# Altium PCB Inverter_Control.PcbDoc (part 2 of 2)
Units mm, origin at the board's own origin, x right, y up, seen from the top; angles counter-clockwise.
Board outline 150 x 40 mm, 4 copper layers (TOP, GND, PWR, BOT), stack 1.44 mm thick; 99 components, 92 nets, 378 pads, 6 vias.
Unrouted connection lines stored in the file: 133.
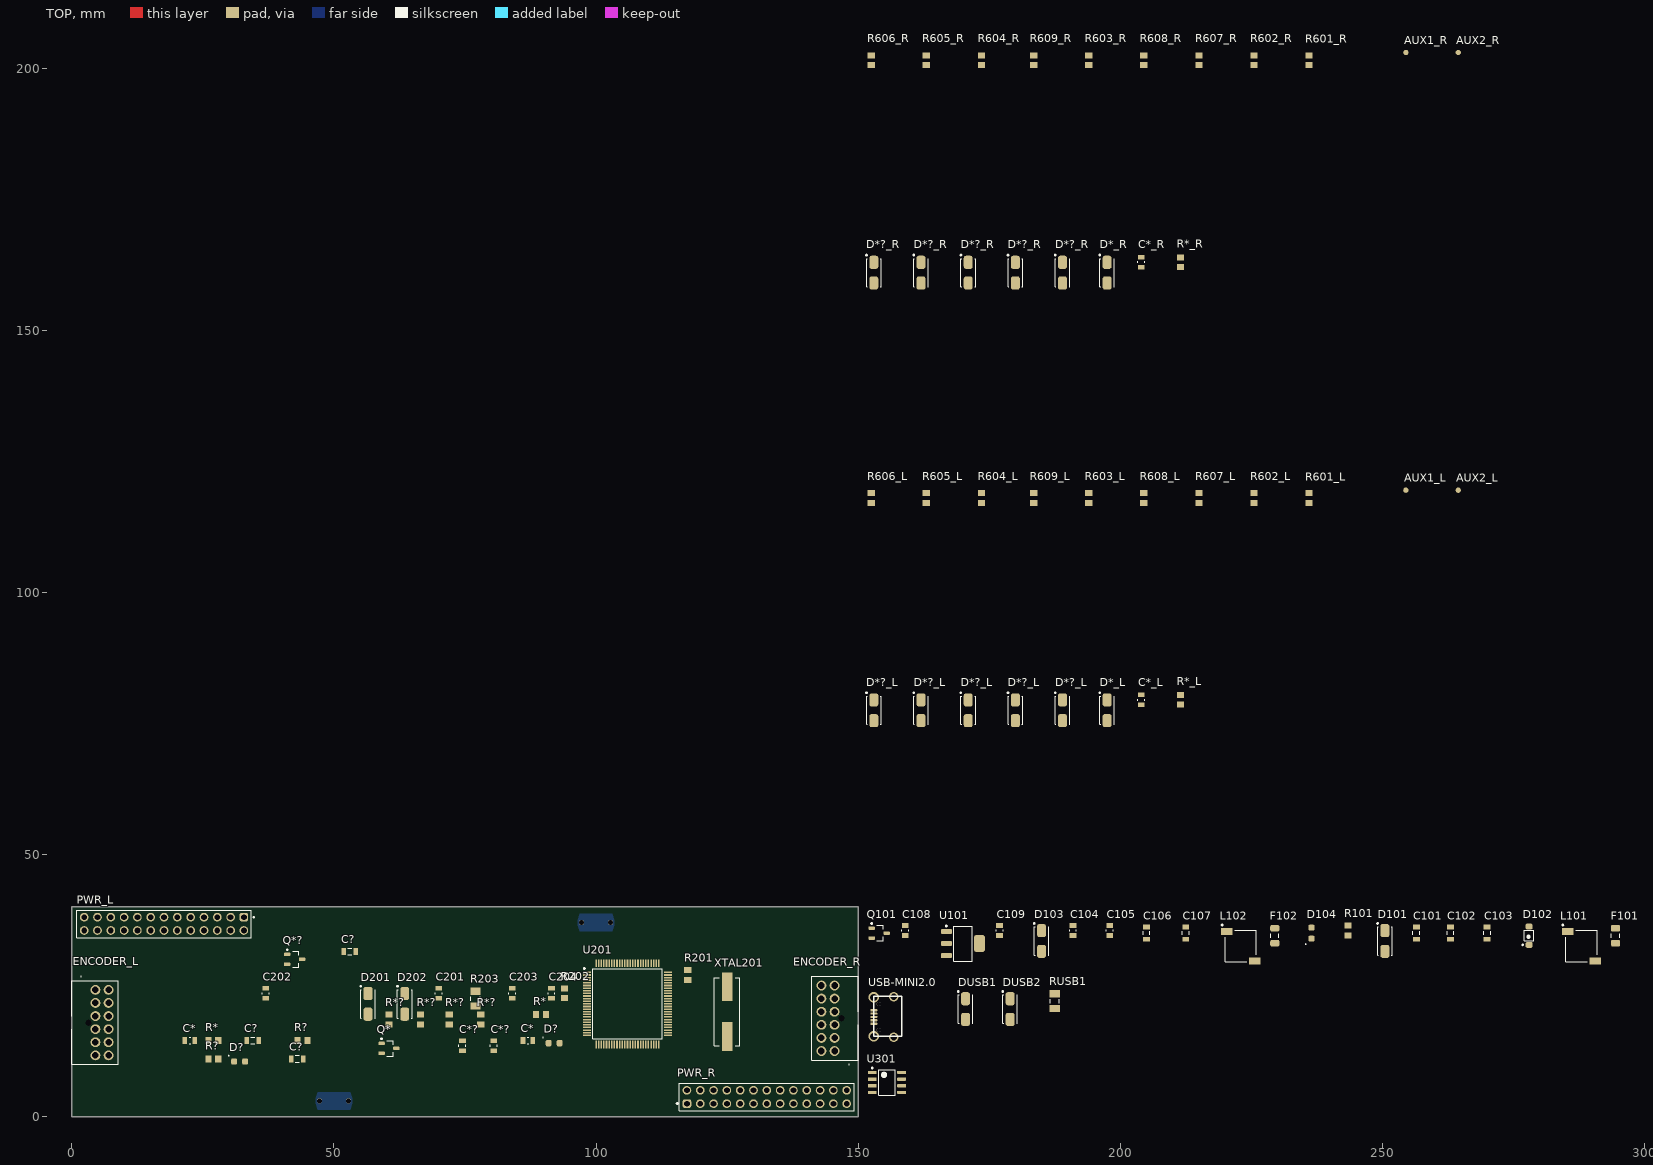
[diagram p0: TOP view]

## Part data (continued)
R601_L R601_R R602_L R602_R R603_L R603_R R604_L R604_R R605_L R605_R R606_L R606_R R* R*? R*? R*?: library part R10k-0805FTK, "BOURNS         CR0805-JW-103ELF            Surface Mount Chip Resistor, Thick Film, CR Series, 10 kohm, 125 mW,  5%, 150 V", Case Code (Imperial)=0805, Case Code (Metric)=2012, Manufacturer 1=Bourns, Max Operating Temperature=155°C, Max Power Dissipation=125mW, Min Operating Temperature=-55°C, Package Quantity=1, Resistance=10kR, Resistance Tolerance=5%, Resistor Type="Thick Film", Temperature Coefficient=200ppm/°C, Voltage Rating=150V, Voltage Rating (DC)=100V, .Creator=DR, Case/Package=0805, Category="Chip SMD Resistors", ComponentLink1Description=https://datasheet.ciiva.com/11821/0900766b80fcdb72-11821135.pdf?src-supplier=RSComponents, ComponentLink1URL=https://datasheet.ciiva.com/11821/0900766b80fcdb72-11821135.pdf?src-supplier=RSComponents, ComponentLink2Description=https://datasheet.ciiva.com/9122/chpreztr-9122374.pdf?src-supplier=Avnet, ComponentLink2URL=https://datasheet.ciiva.com/9122/chpreztr-9122374.pdf?src-supplier=Avnet, ComponentLink3Description=https://datasheet.ciiva.com/22693/1902866-22693254.pdf?src-supplier=Element14, ComponentLink3URL=https://datasheet.ciiva.com/22693/1902866-22693254.pdf?src-supplier=Element14, ComponentLink4Description=https://datasheet.ciiva.com/7986/691949-7986187.pdf?src-supplier=Element14, ComponentLink4URL=https://datasheet.ciiva.com/7986/691949-7986187.pdf?src-supplier=Element14, ComponentLink5Description=https://datasheet.ciiva.com/30065/159chpreztr-30065976.pdf?src-supplier=Onlinecomponents.com, ComponentLink5URL=https://datasheet.ciiva.com/30065/159chpreztr-30065976.pdf?src-supplier=Onlinecomponents.com, ComponentLink6Description=https://datasheet.ciiva.com/16783/70154685-16783482.pdf?src-supplier=Allied+Electronics, ComponentLink6URL=https://datasheet.ciiva.com/16783/70154685-16783482.pdf?src-supplier=Allied+Electronics, ComponentLink7Description=https://datasheet.ciiva.com/5548/chpreztr-5548491.pdf?src-supplier=Mouser, ComponentLink7URL=https://datasheet.ciiva.com/5548/chpreztr-5548491.pdf?src-supplier=Mouser, ComponentLink8Description=https://datasheet.ciiva.com/6559/chpreztr-6559900.pdf?src-supplier=Digi-Key, ComponentLink8URL=https://datasheet.ciiva.com/6559/chpreztr-6559900.pdf?src-supplier=Digi-Key, ComponentLink9Description=https://datasheet.ciiva.com/6559/chpreztr-6559901.pdf?src-supplier=Digi-Key, ComponentLink9URL=https://datasheet.ciiva.com/6559/chpreztr-6559901.pdf?src-supplier=Digi-Key, ComponentLink10Description=https://datasheet.ciiva.com/7985/1856384-7985869.pdf?src-supplier=Element14, ComponentLink10URL=https://datasheet.ciiva.com/7985/1856384-7985869.pdf?src-supplier=Element14, ComponentLink11Description=https://datasheet.ciiva.com/48692/001055517-da-01-en-smd-wid-cr0805-jw-103elf-10k-ohm-1-8w-48692118.pdf?src-supplier=Conrad, ComponentLink11URL=https://datasheet.ciiva.com/48692/001055517-da-01-en-smd-wid-cr0805-jw-103elf-10k-ohm-1-8w-48692118.pdf?src-supplier=Conrad, Construction=Rectangular, Contact Plating=Tin, Depth=1.25mm, Features="Moisture Resistant", Height=0.5mm, Length=2mm, Manufacturer Part Number 1=CR0805-JW-103ELF, Military Standard=Not, Mount="Surface Mount", Number of Pins=2, Number of Terminations=2, Packaging="Tape and Reel", Power Rating=125mW, Pricing 1="1=0,05790, 10=0,01540, 25=0,01340, 100=0,00340 (USD)", Radiation Hardening=No, REACH SVHC="No SVHC", RoHS=Yes, RoHS Compliant=Yes, Series=CR0805, Stock 1=57566, Supplier 1="Arrow Electronics", Supplier Part Number 1=CR0805-JW-103ELF, Technology="THICK FILM", Termination=SMD/SMT, Thickness=508um, TOLERANCE=5%, Width=1.25mm
R607_L R607_R R608_L R608_R R609_L R609_R: library part R15-0805FTN, "TE Connectivity CPF Series Precision Thin Film Surface Mount Resistor 0805 Case 15 0.1% 0.1W 25ppm/C", Case/Package=0805, Manufacturer="TE Connectivity", Max Operating Temperature=125°C, Min Operating Temperature=-55°C, Power Rating=100mW, Resistance=15R, Supplier Part Number 1=6662373, Temperature Coefficient=25ppm/°C, TOLERANCE=0.1%, .Creator=DR, Category=Resistor, ComponentLink1Description=Datasheet, ComponentLink2Description="Where buy it", ComponentLink3Description=https://datasheet.ciiva.com/11812/0900766b80cecff9-11812882.pdf?src-supplier=RSComponents, ComponentLink3URL=https://datasheet.ciiva.com/11812/0900766b80cecff9-11812882.pdf?src-supplier=RSComponents, Depth=1.25mm, Height=0.5mm, Length=2mm, Manufacturer Part Number=CPF0805B15RE, Mount="Surface Mount", Pricing 1="5=0,35100, 50=0,32700, 100=0,30500, 250=0,28400, 500=0,25900 (USD)", RoHS=Yes, Stock 1=1, Supplier 1=RSComponents, Termination=SMD/SMT
R* R*?: library part R1k-0805FTK, "Res Thick Film 0805 1K Ohm 5% 1/8W ±200ppm/°C Molded SMD SMD Paper Tape on Plastic Reel", Case Code (Imperial)=0805, Case Code (Metric)=2012, Manufacturer 1=Bourns, Max Operating Temperature=155°C, Max Power Dissipation=125mW, Min Operating Temperature=-55°C, Package Quantity=1, Resistance=1kR, Resistor Type="Thick Film", Temperature Coefficient=200ppm/°C, TOLERANCE=5%, Voltage Rating=150V, .Creator=GP, Case/Package=0805, Category="Chip SMD Resistors", ComponentLink1Description=https://datasheet.ciiva.com/11821/0900766b80fcdb72-11821134.pdf?src-supplier=RSComponents, ComponentLink1URL=https://datasheet.ciiva.com/11821/0900766b80fcdb72-11821134.pdf?src-supplier=RSComponents, ComponentLink2Description=https://datasheet.ciiva.com/15225/getdatasheetpartid-78155-15225381.pdf?src-supplier=Verical, ComponentLink2URL=https://datasheet.ciiva.com/15225/getdatasheetpartid-78155-15225381.pdf?src-supplier=Verical, ComponentLink3Description=https://datasheet.ciiva.com/22693/1902866-22693253.pdf?src-supplier=Element14, ComponentLink3URL=https://datasheet.ciiva.com/22693/1902866-22693253.pdf?src-supplier=Element14, ComponentLink4Description=https://datasheet.ciiva.com/7986/1856384-7986184.pdf?src-supplier=Element14, ComponentLink4URL=https://datasheet.ciiva.com/7986/1856384-7986184.pdf?src-supplier=Element14, ComponentLink5Description=https://datasheet.ciiva.com/7985/1856384-7985867.pdf?src-supplier=Element14, ComponentLink5URL=https://datasheet.ciiva.com/7985/1856384-7985867.pdf?src-supplier=Element14, ComponentLink6Description=https://datasheet.ciiva.com/30242/159chpreztr-30242765.pdf?src-supplier=Onlinecomponents.com, ComponentLink6URL=https://datasheet.ciiva.com/30242/159chpreztr-30242765.pdf?src-supplier=Onlinecomponents.com, ComponentLink7Description=https://datasheet.ciiva.com/6547/chpreztr-6547359.pdf?src-supplier=Digi-Key, ComponentLink7URL=https://datasheet.ciiva.com/6547/chpreztr-6547359.pdf?src-supplier=Digi-Key, Contact Plating=Tin, Depth=1.25mm, Features="Moisture Resistant", Height=0.5mm, Lead Free="Lead Free", Length=2mm, Manufacturer Part Number 1=CR0805-JW-102ELF, Military Standard=Not, Mount="Surface Mount", Number of Pins=2, Number of Terminations=2, Packaging="Tape and Reel", Power Rating=125mW, Pricing 1="1=0,05930, 10=0,03510, 25=0,01790, 100=0,00800, 250=0,00790, 500=0,00590, 1000=0,00360, 3000=0,00350, 6000=0,00250 (USD)", Radiation Hardening=No, REACH SVHC="No SVHC", RoHS=Yes, Stock 1=27510, Supplier 1="Arrow Electronics", Supplier Part Number 1=CR0805-JW-102ELF, Termination=SMD/SMT, Thickness=508um, Voltage Rating (DC)=150V, Width=1.25mm
R? R?: "Res Thin Film 0805 60.4 Ohm 0.1% 1/8W ±25ppm/°C Molded SMD SMD Punched Carrier T/R", Case Code (Imperial)=0805, Case Code (Metric)=2012, Manufacturer 1=Panasonic, Manufacturer Part Number 1=ERA-6AEB60R4V, Max Operating Temperature=155°C, Max Power Dissipation=125mW, Min Operating Temperature=-55°C, Package Quantity=5000, Resistance=60.4R, Resistor Type="Thin Film,Metal Film", Temperature Coefficient=25ppm/°C, TOLERANCE=0.1%, Voltage Rating=200V, Voltage Rating (DC)=100V, .Creator=DR, Case/Package=0805, Category="Chip SMD Resistors", ComponentLink1Description=https://datasheet.ciiva.com/11811/0900766b80eb1d8c-11811180.pdf?src-supplier=RSComponents, ComponentLink1URL=https://datasheet.ciiva.com/11811/0900766b80eb1d8c-11811180.pdf?src-supplier=RSComponents, ComponentLink2Description=https://datasheet.ciiva.com/41450/001181146-da-01-en-widerstand-era-0805-60r4-0-1-5000st-41450303.pdf?src-supplier=Conrad, ComponentLink2URL=https://datasheet.ciiva.com/41450/001181146-da-01-en-widerstand-era-0805-60r4-0-1-5000st-41450303.pdf?src-supplier=Conrad, ComponentLink3Description=https://datasheet.ciiva.com/5951/485442-5951173.pdf?src-supplier=Farnell, ComponentLink3URL=https://datasheet.ciiva.com/5951/485442-5951173.pdf?src-supplier=Farnell, ComponentLink4Description=https://datasheet.ciiva.com/30184/54aoa0000ce26-30184022.pdf?src-supplier=Onlinecomponents.com, ComponentLink4URL=https://datasheet.ciiva.com/30184/54aoa0000ce26-30184022.pdf?src-supplier=Onlinecomponents.com, ComponentLink5Description=https://datasheet.ciiva.com/9188/aoa0000ce26-9188476.pdf?src-supplier=Avnet, ComponentLink5URL=https://datasheet.ciiva.com/9188/aoa0000ce26-9188476.pdf?src-supplier=Avnet, Contact Plating=Tin, Depth=1.25mm, Features="Automotive AEC-Q200", Height=0.5mm, Lead Free="Lead Free", Length=2mm, Mount="Surface Mount", Number of Pins=2, Number of Terminations=2, Packaging="Tape and Reel", Power Rating=125mW, Pricing 1="1=0,04650, 10=0,03900, 100=0,02860 (USD)", Radiation Hardening=No, RoHS=Yes, Stock 1=5000, Supplier 1="Arrow Electronics", Supplier Part Number 1=ERA-6AEB60R4V, Termination=SMD/SMT, Weight=0.000194oz, Width=1.25mm
U101: library part LDO_10V-0.8/3V3-SOT223, "LDO Regulator Pos 3.3V 0.8A 4-Pin(3+Tab) SOT-223 T/R / IC REG LDO 3.3V 0.8A SOT223", Case/Package=SOT-223, Current Rating=800A, Dropout Voltage=1.2V, Manufacturer="Texas Instruments", Max Input Voltage=15V, Max Operating Temperature=125°C, Max Output Current=800mA, Max Supply Voltage=10V, Min Input Voltage=2.6V, Min Operating Temperature=-40°C, Min Supply Voltage=4.75V, Nominal Output Voltage=3.3V, Output Voltage Accuracy=1%, Package Quantity=1000, Quiescent Current=15mA, Supplier Part Number 1=LM1117IMP-3.3/NOPBCT-ND, .Creator=GP, Accuracy=1%, Category=LDO, ComponentLink1Description=Datasheet, ComponentLink1URL=https://www.ti.com/lit/ds/symlink/lm1117.pdf?HQS=dis-mous-null-mousermode-dsf-pf-null-wwe&DCM=yes&ref_url=https%3A%2F%2Fwww.mouser.de%2F&distId=26, ComponentLink2Description="Where buy it", ComponentLink2URL=https://www.mouser.es/ProductDetail/Texas-Instruments/LM1117IMP-33-NOPB?qs=X1J7HmVL2ZFbpN1TgOsjYQ%3D%3D, ComponentLink3Description=https://datasheet.ciiva.com/27051/1281318-27051810.pdf?src-supplier=Jameco, ComponentLink3URL=https://datasheet.ciiva.com/27051/1281318-27051810.pdf?src-supplier=Jameco, ComponentLink4Description=https://datasheet.ciiva.com/8042/1670636-8042261.pdf?src-supplier=Element14, ComponentLink4URL=https://datasheet.ciiva.com/8042/1670636-8042261.pdf?src-supplier=Element14, ComponentLink5Description=https://datasheet.ciiva.com/1570/1849796-1570171.pdf?src-supplier=Farnell, ComponentLink5URL=https://datasheet.ciiva.com/1570/1849796-1570171.pdf?src-supplier=Farnell, ComponentLink6Description=https://datasheet.ciiva.com/14149/lm1117-eng-tds-14149980.pdf?src-supplier=Distrelec, ComponentLink6URL=https://datasheet.ciiva.com/14149/lm1117-eng-tds-14149980.pdf?src-supplier=Distrelec, ComponentLink7Description=https://datasheet.ciiva.com/46386/1882372-46386042.pdf?src-supplier=Element14, ComponentLink7URL=https://datasheet.ciiva.com/46386/1882372-46386042.pdf?src-supplier=Element14, ComponentLink8Description=https://datasheet.ciiva.com/3223/lm1117-n-3223515.pdf?src-supplier=Avnet, ComponentLink8URL=https://datasheet.ciiva.com/3223/lm1117-n-3223515.pdf?src-supplier=Avnet, ComponentLink9Description=https://datasheet.ciiva.com/6580/lm1117-n-6580030.pdf?src-supplier=Digi-Key, ComponentLink9URL=https://datasheet.ciiva.com/6580/lm1117-n-6580030.pdf?src-supplier=Digi-Key, ComponentLink10Description=https://datasheet.ciiva.com/6580/lm1117-n-6580026.pdf?src-supplier=Digi-Key, ComponentLink10URL=https://datasheet.ciiva.com/6580/lm1117-n-6580026.pdf?src-supplier=Digi-Key, Height=1.6mm, Lead Free="Lead Free", Length=6.5mm, Manufacturer Part Number=LM1117IMP-3.3/NOPB, Min Current Limit=800mA, Mount="Surface Mount", Number of Outputs=1, Number of Pins=4, Number of Regulators=1, Output Current=800mA, Output Type=Fixed, Output Voltage=3.3V, Packaging="Tape and Reel", Polarity=Positive, Pricing 1="1=1,41000, 10=1,26300, 25=1,19920, 100=0,98500, 250=0,92072, 500=0,81366 (USD)", Radiation Hardening=No, REACH SVHC="No SVHC", RoHS=Yes, RoHS Compliant=Yes, Supplier 1=Digi-Key, Termination=SMD/SMT, Width=3.56mm
U201: "ARM Microcontrollers - MCU 16/32-BITS MICROS", Manufacturer_Name=STMicroelectronics, Mouser Part Number=511-STM32F777VIT6, Datasheet Link=https://www.st.com/resource/en/datasheet/stm32f777vi.pdf, Geometry.Height=1.6mm, Manufacturer_Part_Number=STM32F777VIT6, Mouser Price/Stock=https://www.mouser.co.uk/ProductDetail/STMicroelectronics/STM32F777VIT6?qs=qzCNEk%252BRr%252BbclRoyC9pexg%3D%3D, Supplier 1=Mouser, Supplier Part Number 1=511-STM32F777VIT6
U301: library part "Transceiver CAN MCP2551 I/SN"
USB-MINI2.0: library part USB_MINI2.0, "Horizontal SMT Type B Version 2.0 MicroUSB Connector Socket; 30 V ac; 3A WR-COM", Manufacturer="Wurth Electronics", Supplier Part Number 1=732-5960-2-ND, .Creator=GP, Category="USB Connectors", ComponentLink1Description=https://datasheet.ciiva.com/48416/629105150521-48416058.pdf?src-supplier=Distrelec, ComponentLink1URL=https://datasheet.ciiva.com/48416/629105150521-48416058.pdf?src-supplier=Distrelec, Connector Type=USB, Contact Material="Copper Alloy", Contact Plating=Gold, Features=Shielded, Gender=Receptacle, Lead Free="Lead Free", Manufacturer Part Number=629105150521, Mount="Surface Mount,Horizontal", Number of Contacts=5, Orientation="Right Angle", Packaging="Tape and Reel", Pricing 1="550=1,38500 (USD)", REACH SVHC=Unknown, RoHS=Yes, RoHS Compliant=Yes, Stock 1=815, Supplier 1=Digi-Key, Termination=SMD/SMT, USB Standard="USB 2.0"
XTAL201: library part XTAL20M_SMD, "830028710, 20 MHz", Frequency="20 MHz", Frequency Stability="+-50 ppm", Manufacturer="Würth Elektronik", Max operating temperature.=85ºC, Min Operating Temperature=-40ºC, Supplier Part Number 1=1923-830028710CT-ND, .Creator=GP, Category=XTAL, ComponentLink1Description=Datasheet, ComponentLink1URL=https://www.we-online.com/catalog/datasheet/830028710.pdf, ComponentLink2Description="Where buy it", Drive level="500µW max", Manufacturer Part Number=830028710, Number of Pins=2, Packaging=Reel, Pricing 1="1=0,37000, 10=0,28100, 50=0,26800, 100=0,24400, 500=0,22000 (USD)", RoHS=Yes, Stock 1=975, Supplier="Würth Elektronik", Supplier 1=Digi-Key, Type=SMD

## Via types
v1: diameter 1.8, hole 1.2, TOP to BOT, 2 vias
v2: diameter 2, hole 1.4, TOP to BOT, 2 vias
v3: diameter 0.8, hole 0.8, TOP to BOT, 2 vias

## Nets (pads, with @x,y where several pads share a name; then routed paths per layer and width w, separated by ;. In a path a pad name is that pad's centre, name@x,y a point inside that pad or via, vN(x,y) a via of type N, cw(c..) or ccw(c..) an arc to the next point about the centre after c; other vN are vias at no path point)
5V_USB: F102.2 Q101.D
+3.3: C109.2 R101.1 RUSB1.2 U101.2 U101.4
+3V3: R203.2
+5: C108.1 C*.2 C*?.2 ENCODER_L.7 ENCODER_R.7 PWR_L.23 PWR_L.24 PWR_R.23 PWR_R.24 Q101.G Q101.S R*.1@88.575,19.5 R*?.1@78,17.575 U101.3 U301.3
A+_L: D*?_L.2@153,79.475 ENCODER_L.4
A+_R: D*?_R.2@153,162.975 ENCODER_R.4
A-_L: D*?_L.2@162,79.475 ENCODER_L.10
A-_R: D*?_R.2@162,162.975 ENCODER_R.10
B+_L: D*?_L.2@171,79.475 ENCODER_L.3
B+_R: D*?_R.2@171,162.975 ENCODER_R.3
B-_L: D*?_L.2@180,79.475 ENCODER_L.9
B-_R: D*?_R.2@180,162.975 ENCODER_R.9
CAN1_H: 
CAN1_L: 
CAN1_RX: R*?.1@60.5,17.575 U301.4
CAN1_TX: R*.1@26.074,14.5 U301.1
ENABLE_L: PWR_L.6
ENABLE_R: PWR_R.6
GND: C101.2 C102.2 C103.2 C104.2 C105.2 C106.2 C107.2 C108.2 C109.1 C201.1 C202.1 C203.2 C204.2 C*.1 C*?.1 C?.2@44.149,11 C?.2@54.15,31.5 D101.1 D103.2 D104.K D201.2 D202.2 D*?_L.1 D*?_R.1 D*_L.1 D*_R.1 DUSB1.2 DUSB2.2 ENCODER_L.1 ENCODER_R.1 MP_L.1 MP_R.1 PWR_L.1 PWR_L.2 PWR_L.25 PWR_L.26 PWR_R.1 PWR_R.2 PWR_R.25 PWR_R.26 Q*.S Q*?.S R202.2 R602_L.2 R602_R.2 R604_L.2 R604_R.2 R606_L.2 R606_R.2 R*?.2@66.5,19.425 R*?.2@72,19.425 U101.1 U301.2 U301.8 USB-MINI2.0.4 USB-MINI2.0.5
I_A_L: PWR_L.7 R601_L.1
I_A_meas_L: R601_L.2 R602_L.1
I_A_meas_R: R601_R.2 R602_R.1
I_A_R: PWR_R.7 R601_R.1
I_B_L: PWR_L.8 R603_L.1
I_B_meas_L: R603_L.2 R604_L.1
I_B_meas_R: R603_R.2 R604_R.1
I_B_R: PWR_R.8 R603_R.1
I_C_L: PWR_L.9 R605_L.1
I_C_meas_L: R605_L.2 R606_L.1
I_C_meas_R: R605_R.2 R606_R.1
I_C_R: PWR_R.9 R605_R.1
"LV+ in": D101.2 D102.A
NetAUX1_L_1: AUX1_L.1 PWR_L.17
NetAUX1_R_1: AUX1_R.1 PWR_R.17
NetAUX2_L_1: AUX2_L.1 PWR_L.18
NetAUX2_R_1: AUX2_R.1 PWR_R.18
NetC101_1: C101.1 C102.1 D102.K L101.1
NetC103_1: C103.1 F101.1 L101.2
NetC107_1: C107.1 F102.1 L102.2
NetC*_L_2: C*_L.2 R*_L.1
NetC*_R_2: C*_R.2 R*_R.1
NetC?_2: C?.2@35.649,14.5 R?.1
NetD104_A: D104.A R101.2
NetD?_A: D?.A@93.049,14 R*?.2@78,19.425
NetD?_K: D?.K@90.949,14 Q*?.D
NetL?_1: U301.7
NetL?_2: U301.6
NetQ*?_G: Q*?.G R*?.1@66.5,17.575 R*?.2@60.5,19.425
NetQ*_G: Q*.G R*.2@27.924,14.5 R*?.1@72,17.575
NetU201_6: U201.6
NetU201_81: U201.81
NetU201_82: U201.82
OSC_IN: C201.2 XTAL201.2
OSC_OUT: C202.2 XTAL201.1
PWM1_L: PWR_L.12
PWM1_R: PWR_R.12
PWM2_L: PWR_L.11
PWM2_R: PWR_R.11
PWM3_L: PWR_L.14
PWM3_R: PWR_R.14
PWM4_L: PWR_L.13
PWM4_R: PWR_R.13
PWM5_L: PWR_L.16
PWM5_R: PWR_R.16
PWM6_L: PWR_L.15
PWM6_R: PWR_R.15
SC_END_L: PWR_L.19
SC_END_R: PWR_R.19
T_A_L: PWR_L.3 R607_L.1
T_A_R: PWR_R.3 R607_R.1
T_B_L: PWR_L.4 R608_L.1
T_B_R: PWR_R.4 R608_R.1
T_C_L: PWR_L.5 R609_L.1
T_C_R: PWR_R.5 R609_R.1
T_meas_L: R607_L.2 R608_L.2 R609_L.2
T_meas_R: R607_R.2 R608_R.2 R609_R.2
TRIP_L: PWR_L.10
TRIP_R: PWR_R.10
TSAL_ON_L: PWR_L.21
TSAL_ON_R: PWR_R.21
USB_OTG_H: D201.1 R203.1
USB_OTG_L: D202.1
USB_OTG_VBUS: C203.1 C204.1 R201.2 R202.1
USB_VBUS: R201.1
VDC_sns+_L: PWR_L.20
VDC_sns+_R: PWR_R.20
VDC_sns-_L: PWR_L.22
VDC_sns-_R: PWR_R.22
Z+_L: C*_L.1 D*?_L.2@189,79.475 ENCODER_L.2
Z+_R: C*_R.1 D*?_R.2@189,162.975 ENCODER_R.2
Z-_L: D*_L.2 ENCODER_L.8 R*_L.2
Z-_R: D*_R.2 ENCODER_R.8 R*_R.2
pads on no net: C104.1 C105.1 C106.1 C?.1 D103.1 D?.A@33.05,10.5 D?.K@30.95,10.5 DUSB1.1 DUSB2.1 ENCODER_L.5 ENCODER_L.6 ENCODER_L.11 ENCODER_L.12 ENCODER_L.MH1 ENCODER_R.5 ENCODER_R.6 ENCODER_R.11 ENCODER_R.12 ENCODER_R.MH1 F101.2 L102.1 MP_L.MH1 MP_L.MH2 MP_R.MH1 MP_R.MH2 Q*.D R*.2@90.425,19.5 R?.2 RUSB1.1 U201.1 U201.2 U201.3 U201.4 U201.5 U201.7 U201.8 U201.9 U201.10 U201.11 U201.12 U201.13 U201.14 U201.15 U201.16 U201.17 U201.18 U201.19 U201.20 U201.21 U201.22 U201.23 U201.24 U201.25 U201.26 U201.27 U201.28 U201.29 U201.30 U201.31 U201.32 U201.33 U201.34 U201.35 U201.36 U201.37 U201.38 U201.39 U201.40 U201.41 U201.42 U201.43 U201.44 U201.45 U201.46 U201.47 U201.48 U201.49 U201.50 U201.51 U201.52 U201.53 U201.54 U201.55 U201.56 U201.57 U201.58 U201.59 U201.60 U201.61 U201.62 U201.63 U201.64 U201.65 U201.66 U201.67 U201.68 U201.69 U201.70 U201.71 U201.72 U201.73 U201.74 U201.75 U201.76 U201.77 U201.78 U201.79 U201.80 U201.83 U201.84 U201.85 U201.86 U201.87 U201.88 U201.89 U201.90 U201.91 U201.92 U201.93 U201.94 U201.95 U201.96 U201.97 U201.98 U201.99 U201.100 U301.5 USB-MINI2.0.1 USB-MINI2.0.2 USB-MINI2.0.3
copper on no net:
  other v1: 156.8,15.125 156.8,22.875
  other v2: 153,15.275 153,22.725
  other v3: 153.95,16.5 153.95,21.5